# Altium PCB PCB4.PcbDoc (part 1 of 2)
Units mil, origin at the board's own origin, x right, y up, seen from the top; angles counter-clockwise.
Board outline 6000 x 4000 mil, 2 copper layers (Top Layer, Bottom Layer); 67 components, 41 nets, 192 pads, 16 vias.
Unrouted connection lines stored in the file: 1.
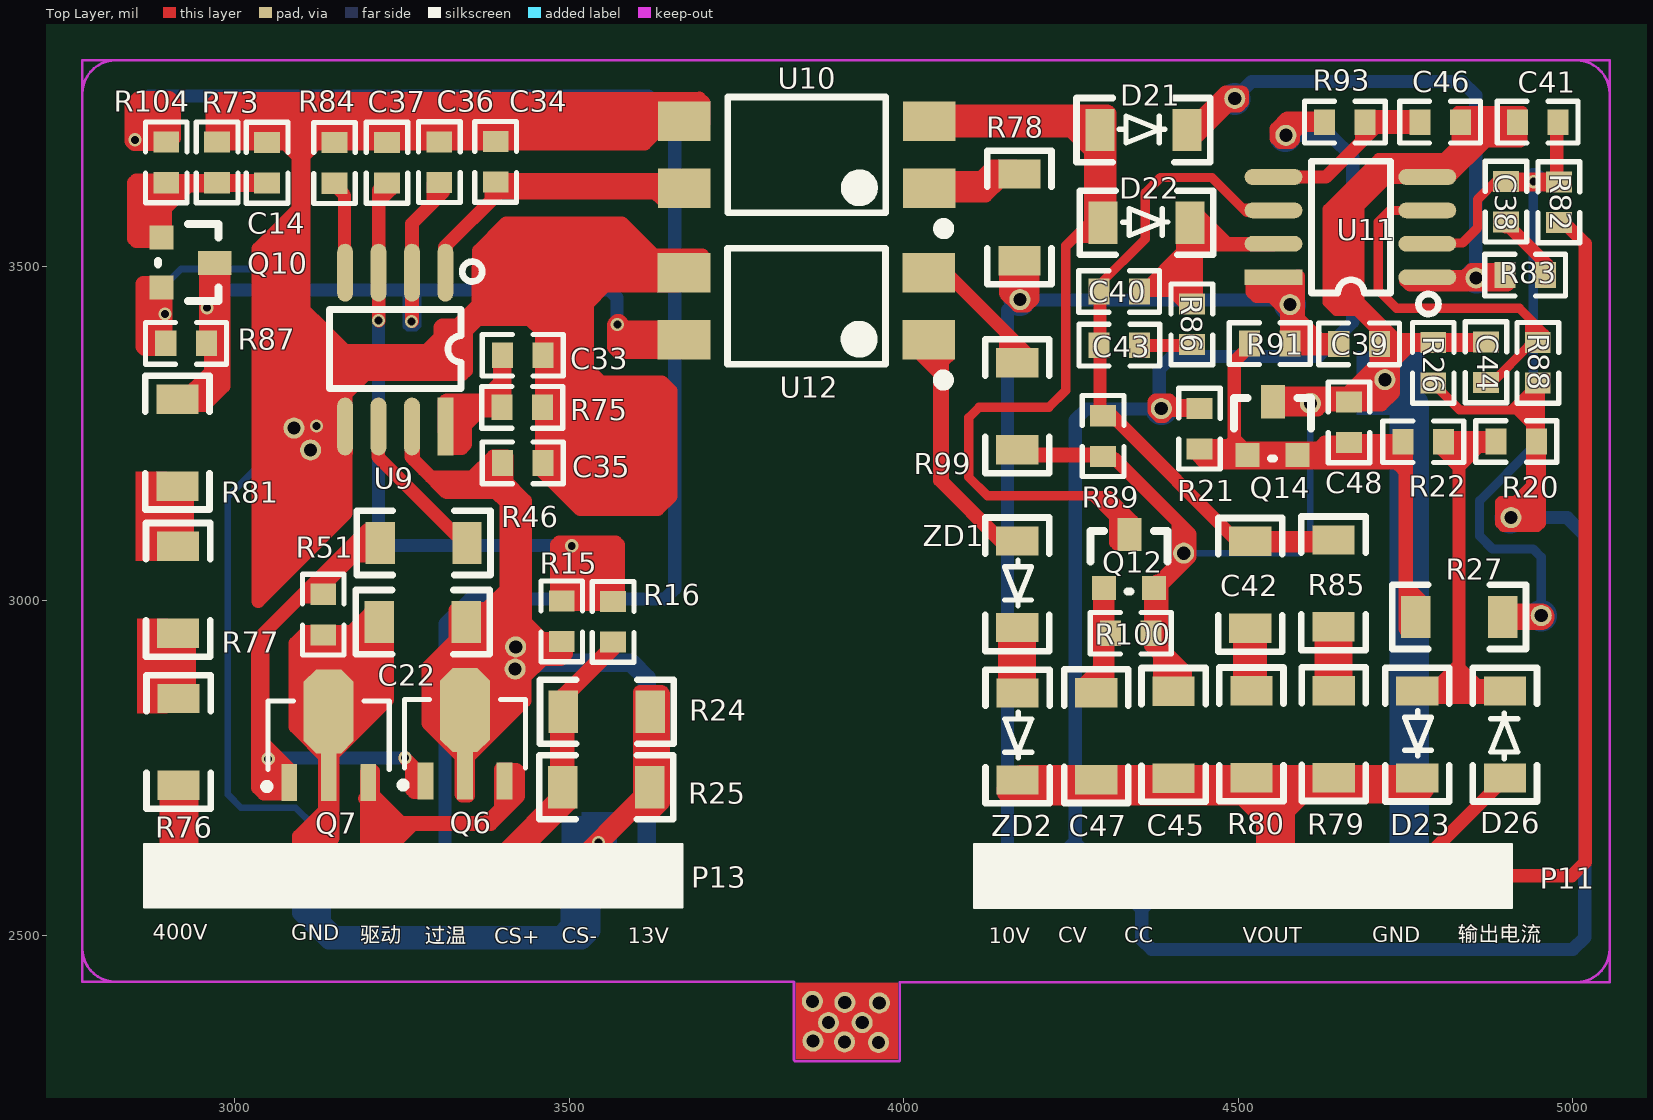
[diagram p0: Top Layer view]
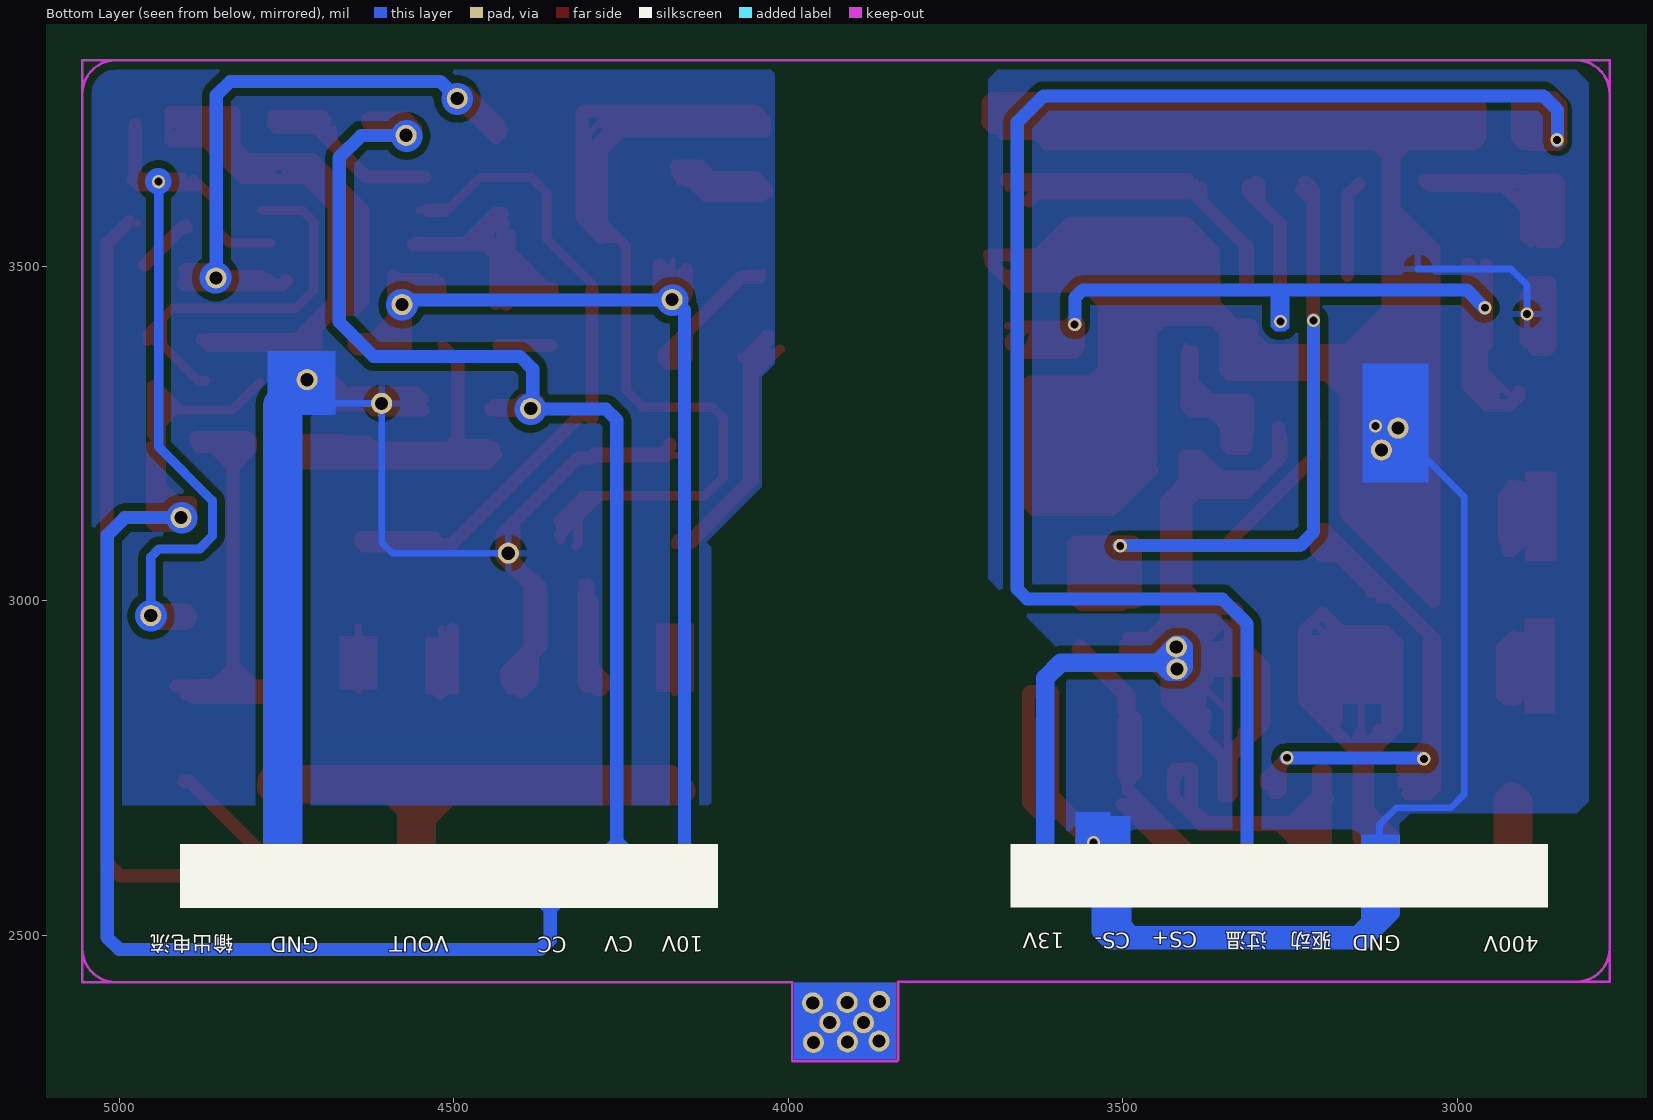
[diagram p1: Bottom Layer view, seen from below]

## Layer stack, top to bottom
Top Layer: signal copper 1.4
Dielectric: dielectric 12.6, FR-4, Dk 4.8
Bottom Layer: signal copper 1.4

## Board outline
1000,1000 7000,1000 7000,5000 1000,5000

## Design rules (kind name [scope] priority, off if disabled: settings)
Clearance [All] p1: gap=10
PolygonConnect [All] p1: connectstyle=Relief reliefconductorwidth=10 reliefentries=4 polygonreliefangle="90 Angle"
RoomDefinition Sheet4 [InComponentClass('Sheet4')] p1: confinementstyle=ConfineIn formatcopy=TRUE lockcomponents=FALSE outline 0,0 2000,0 2000,1000 0,1000
RoutingVias [All] p1: holewidth=28 width=50 viastyle="Through Hole" minholewidth=28 minwidth=50 maxholewidth=28 maxwidth=50
SilkscreenOverComponentPads [All] p1: minsilkscreentomaskgap=10
SolderMaskExpansion [All] p1: expansion=4
Width [All] p1: maxlimit=10 minlimit=10 preferedwidth=10
27 further rules are at their usual default settings.

## Components (designator, comment, footprint, x,y, rotation, side; value= is the part's Value field where it differs from the comment)
C14 "104/50V/0603" 0603 3048.11,3654.76 r90 top
C22 "475/50V/1206" 1206 3280.79,2967.76 r0 top
C33 "105/50V/0603" 0603 3430.39,3366.97 r180 top
C34 "472/50V/0603" 0603 3389.84,3655.94 r270 top
C35 "105/50V/0603" 0603 3430.39,3205.94 r180 top
C36 "104/50V/0603" 0603 3305.59,3655.55 r270 top
C37 "331/50V/0603" 0603 3227.24,3654.76 r270 top
C38 "103/50V/0603" 0603 4900.47,3596.5 r270 top
C39 "105/25V/0603" 0603 4680.79,3383.9 r0 top
C40 "102/50V/0603" 0603 4322.13,3462.24 r180 top
C41 "102/50V/0603" 0603 4947.72,3715.39 r0 top
C42 "102/1KV/1206" 1206 4518.19,3023.66 r270 top
C43 "103/50V/0603" 0603 4322.52,3381.93 r180 top
C44 "104/50V/0603" 0603 4870.55,3356.34 r90 top
C45 "224 250V/1206" 1206 4403.62,2799.25 r90 top
C46 "104/50V/0603" 0603 4802.05,3715.39 r180 top
C47 "223/500V/1206" 1206 4287.87,2797.28 r90 top
C48 "105/25V/0603" 0603 4665.83,3266.57 r90 top
D21 "1N4148W-G" SOD-123 4358.35,3703.58 r0 top
D22 "1N4148W-G" SOD-123 4363.07,3565 r0 top
D23 "E1J" SOD-123 4767.8,2799.65 r270 top
D26 "E1J" SOD-123 4898.9,2799.65 r90 top
P11 "2.54*8" 2.54*8#1 4456.38,2588.23 r0 top
P13 "2.54*8" 2.54*8#2 3215.83,2588.62 r0 top
Q6 "D882" D882 3343.78,2813.43 r270 top
Q7 "D772" D772 3141.42,2812.64 r270 top
Q10 "2N7002K" SOT-23/MOS 2924.49,3504.76 r270 top
Q12 "2N7002K" SOT-23/MOS 4337.48,3053.19 r0 top
Q14 "ME431AXG" ME431AXG 4552.05,3252.01 r0 top
R15 "120K 1%/0603" 0603 3488.66,2968.94 r270 top
R16 "1K 1%/0603" 0603 3565.43,2968.15 r90 top
R20 "39K 1%/0603" 0603 4915.83,3237.83 r180 top
R21 "10K 1%/0603" 0603 4442.2,3257.13 r90 top
R22 "2.2K 1%/0603" 0603 4776.85,3237.44 r180 top
R24 "20R 1%/1206" 1206 3555.98,2833.9 r0 top
R25 "20R 1%/1206" 1206 3555.2,2720.91 r0 top
R26 "1K 1%/0603" 0603 4791.81,3355.55 r90 top
R27 "470K 1%/1206" 1206 4830.39,2975.63 r180 top
R46 "39R/1206" 1206 3281.97,3086.26 r0 top
R51 "10K/0603" 0603 3131.97,2979.17 r270 top
R73 "2K/0603" 0603 2973.31,3655.16 r90 top
R75 "470K 1%/0603" 0603 3429.61,3289.02 r180 top
R76 "100K 1%/1206" 1206 2915.83,2788.62 r270 top
R77 "150K 1%/1206" 1206 2915.04,3016.18 r270 top
R78 "2K/1206" 1206 4172.91,3572.87 r270 top
R79 "9.1K 1%/1206" 1206 4642.99,2800.43 r270 top
R80 "2K 1%/1206" 1206 4519.76,2800.04 r270 top
R81 "150K 1%/1206" 1206 2913.86,3236.26 r270 top
R82 "1K 1%/0603" 0603 4979.61,3595.71 r90 top
R83 "10K/0603" 0603 4929.21,3486.65 r0 top
R84 "39K 1%/0603" 0603 3148.9,3654.37 r90 top
R85 "8.2K 1%/1206" 1206 4642.6,3025.63 r270 top
R86 "10K/0603" 0603 4430.79,3413.03 r90 top
R87 "2K 1%/0603" 0603 2926.85,3384.68 r0 top
R88 "10K/0603" 0603 4948.11,3355.55 r270 top
R89 "2K 1%/0603" 0603 4298.11,3246.1 r270 top
R91 "2K/0603" 0603 4547.32,3384.29 r180 top
R93 "10K 1%/0603" 0603 4659.53,3715.39 r0 top
R99 "220R/1206" 1206 4169.76,3290.59 r90 top
R100 "100K/0603" 0603 4339.45,2951.22 r0 top
R104 "2K/0603" 0603 2897.32,3655.16 r270 top
U9 "NCP1252A" SOP8 3272.52,3379.96 r270 top
U10 "EL817S1(A)(TU)-F" EL817A 3855.59,3683.11 r0 top
U11 "LM258" SOp8 4672.52,3525.63 r180 top
U12 "EL817S1(A)(TU)-F" EL817A 3855.2,3456.73 r0 top
ZD1 "13V" SOD-123 4169.76,3024.45 r270 top
ZD2 "13V" SOD-123 4170.16,2796.89 r270 top

## Footprints (in the part's own frame and the unit in brackets; to place one, negate y for a bottom-side part, rotate by r counter-clockwise, add the part's x,y. Pads: shape width x height; smd on the part's side, far side on the other; paste and mask are expansions set on the pad)
2.54*8#1 [mm]
  oval 1.4x1.8 hole 1: 1(-7.62,0) 2(-5.08,0) 3(-2.54,0) 5(2.54,0) 7(7.62,0) 8(10.16,0)
  round 0 hole 1: 4(0,0) 6(5.08,0)
  silkscreen extent -8.92,-1.2 11.5,1.2
2.54*8#2 [mm]
  oval 1.4x1.8 hole 1: 1(-7.62,0) 3(-2.54,0) 4(0,0) 5(2.54,0) 6(5.08,0) 7(7.62,0) 8(10.16,0)
  round 0 hole 1: 2(-5.08,0)
  silkscreen extent -8.92,-1.2 11.5,1.2
0603 [mm]
  rect 0.8x0.98 smd: 1(0.77,0) 2(-0.77,0)
  silkscreen extent -1.53,-0.79 1.54,0.79
1206 [mil]
  rect 44x63 smd: 1(-65,0) 2(65,0)
  silkscreen extent -100,-48 100,48
D772 [mm]
  rect 1.4x0.6 smd: 1(2.151,1.468) 2(2.151,-1.532)
  oct 3.2x1.9 smd: 3(-0.549,-0.032)
  rect 1.8x0.6 smd: 3(1.951,-0.032)
  silkscreen extent -0.95,-2.51 2.43,2.27
D882 [mm]
  rect 1.4x0.6 smd: 1(2.116,1.505) 2(2.116,-1.495)
  oct 3.2x1.9 smd: 3(-0.584,0.005)
  rect 1.8x0.6 smd: 3(1.916,0.005)
  silkscreen extent -0.98,-2.47 2.39,2.3
EL817A [mm]
  rect 2x1.5 smd: 1(4.633,-1.693) 2(4.633,0.847) 3(-4.667,0.847) 4(-4.667,-1.693)
  silkscreen extent -3.02,-3.42 5.38,1.78
ME431AXG [mil]
  rect 36x50 smd: 1(-0.19,45.63)
  rect 36x36 smd: 2(-38.19,-34.37) 3(36.81,-34.37)
  silkscreen extent -58,-39 57,51
SOD-123 [mm]
  rect 1.1x1.6 smd: 1(-1.65,0) 2(1.65,0)
  silkscreen extent -2.54,-1.22 2.54,1.22
SOP8 [mm]
  oval 2.2x0.6 smd: 1(-2.804,1.071) 2(-2.804,-0.199) 3(-2.804,-1.469) 4(-2.804,-2.739) 5(3.038,-2.739) 6(3.038,-1.469) 7(3.038,-0.199)
  rect 2.2x0.6 smd: 8(3.038,1.071)
  silkscreen extent -3.23,-3.33 1.6,2.47
SOp8 [mm]
  oval 2.2x0.6 smd: 1(-2.804,1.071) 2(-2.804,-0.199) 3(-2.804,-1.469) 4(-2.804,-2.739) 5(3.038,-2.739) 6(3.038,-1.469) 7(3.038,-0.199)
  rect 2.2x0.6 smd: 8(3.038,1.071)
  silkscreen extent -3.23,-3.33 1.6,2.47
SOT-23/MOS [mil]
  rect 36x50 smd: D(-0.19,45.63)
  rect 36x36 smd: G(-38.19,-34.37) S(36.81,-34.37)
  silkscreen extent -58,-39 57,51

## Part data
C14 C22 C33 C34 C35 C36 C37 C38 C39 C40 C41 C42 C43 C44 C45 C46 C47 C48: library part CAP, "Capacitor"
D21 D22 D23 D26: library part DIODE, "Diode"
P11 P13: library part "Header 8", "Header, 8-Pin"
Q6: library part 2N3904, "NPN General Purpose Amplifier"
Q7: library part 2N3906, "PNP General Purpose Amplifier"
Q10 Q12: library part "MOSFET N"
Q14: library part SCR, "Silicon Controlled Rectifier"
R15 R16 R20 R21 R22 R24 R25 R26 R27 R46 R51 R73 R75 R76 R77 R78 R79 R80 R81 R82 R83 R84 R85 R86 R87 R88 R89 R91 R93 R99 R100 R104: library part RES2
U9: library part Component_1
U10 U12: library part Optoisolator1, "4-Pin Phototransistor Optocoupler"
U11: library part AP4310
ZD1 ZD2: library part "DIODE TUNNEL", "Diode Tunnel"

## Free pads (board coordinates)
  round 31.5 hole 19.68: 0(3419.76,2930.75) 1(3863.46,2400.83) 2(3911.89,2399.25) 2(4953.23,2977.6) 3(3963.46,2398.46) 4(3864.25,2341.38) 5(3911.5,2340.2) 6(3962.28,2339.41) 7(3937.87,2368.94) 8(3887.48,2368.94) 28(3418.98,2897.68) 29(3113.07,3225.24) 30(3088.27,3257.91) 32(4173.7,3450.04) 33(4577.64,3442.56) 34(4855.59,3482.32) 35(4494.96,3750.83) 36(4571.34,3695.71) 37(4385.12,3287.05) 39(4607.95,3294.92) 40(4719.37,3330.35) 41(4907.95,3124.06) 42(4418.58,3070.91)

## Via types
v1: diameter 19.68, hole 11.81, Top Layer to Bottom Layer, 16 vias

## Nets (pads, with @x,y where several pads share a name; then routed paths per layer and width w, separated by ;. In a path a pad name is that pad's centre, name@x,y a point inside that pad or via, vN(x,y) a via of type N, cw(c..) or ccw(c..) an arc to the next point about the centre after c; other vN are vias at no path point)
10V: C39.2 P11.1 pad.32 pad.33 R78.2 R91.2 U11.8 | length 1840.4
  Top Layer w10: R78.2@4172.91,3507.87 4172.91,3450.83 pad.32@4173.7,3450.04 ; U11.8@4552.91,3483.46 4580,3456.38 4580,3383.11 C39.2@4653.23,3383.11
  Bottom Layer w10: P11.1@4156.38,2588.23 4156.38,3013.03 ; 4156.38,3094.13 4156.38,3013.03 ; pad.32@4175.67,3450.04 4570.16,3450.04 pad.33@4577.64,3442.56 ; pad.32@4178.82,3450.04 4156.38,3427.6 4156.38,3013.03
  Bottom Layer w19.68: P11.1@4156.77,2591.77 4154.02,2589.02 4140.63,2589.02 4135.91,2584.29 4135.91,2562.64 4139.06,2559.49 4170.55,2559.49 4176.85,2565.79 4176.85,2611.06 4173.7,2614.21 4139.06,2614.21 4135.91,2611.06 4135.91,2574.45 4137.48,2572.87 P11.1@4159.53,2572.87
13V-3: C22.2 C35.1 P13.8 pad.0 pad.28 Q6.3 R15.1 U9.7 | length 1725.4
  Top Layer w10: U9.7@3264.69,3260.35 3264.69,3216.54 3300.47,3180.75 3363.86,3180.75 C35.1@3402.44,3219.33 ; Q6.3@3343.57,2734.05 3343.57,2832.47 3343.57,2965.53 C22.2@3345.79,2967.76 3374.92,2938.62 R15.1@3488.66,2938.62 ; Q6.3@3343.96,2836.41 3414.68,2907.13 pad.28@3416.61,2907.13 ; C35.1@3400.08,3210.28 3400.08,3184.29 3417.01,3167.36 pad.0@3417.01,2938.62
  Bottom Layer w10: pad.28@3418.98,2907.13 3594.17,2907.13 3615.83,2885.47 P13.8@3615.83,2588.62
  Bottom Layer w19.68: P13.8@3615.43,2594.13 3612.68,2591.38 3599.29,2591.38 3594.57,2586.65 3594.57,2565 3597.72,2561.85 3629.21,2561.85 3635.51,2568.15 3635.51,2613.43 3632.36,2616.57 3597.72,2616.57 3594.57,2613.43 3594.57,2576.81 3596.14,2575.24 P13.8@3618.19,2575.24
400V: P13.1 R76.2 | length 365.4
  Top Layer w10: P13.1@2915.83,2588.62 R76.2@2915.83,2723.62
  Bottom Layer w19.68: P13.1@2894.96,2576.02 2896.54,2574.45 P13.1@2918.58,2574.45 ; P13.1@2894.96,2585.87 2899.69,2590.59 2913.07,2590.59 P13.1@2915.83,2593.35 ; P13.1@2894.96,2564.21 2894.96,2612.64 2898.11,2615.79 2932.76,2615.79 2935.91,2612.64 2935.91,2567.36 2929.61,2561.06 2898.11,2561.06 P13.1@2894.96,2564.21
CC-ADJ: P11.3 pad.41 R20.2 R26.2 R88.1 | length 2146.5
  Top Layer w10: R26.2@4791.42,3326.02 4833.15,3284.29 4907.17,3284.29 R88.1@4948.11,3325.24 4948.11,3239.8 R20.2@4946.14,3237.83 4946.14,3165 pad.41@4904.41,3123.27
  Bottom Layer w10: P11.3@4356.38,2588.23 4356.38,2494.53 4374.49,2476.42 4998.11,2476.42 5018.98,2497.28 5018.98,3098.46 4993.39,3124.06 pad.41@4907.95,3124.06
  Bottom Layer w19.68: P11.3@4357.17,2594.53 4354.41,2591.77 4341.02,2591.77 4336.3,2587.05 4336.3,2565.39 4339.45,2562.24 4370.94,2562.24 4377.24,2568.54 4377.24,2613.82 4374.09,2616.97 4339.45,2616.97 4336.3,2613.82 4336.3,2577.2 4337.87,2575.63 P11.3@4359.92,2575.63
CJ-2.5V: C48.2 Q14.2 Q14.3 R21.2 R22.1 R27.2 R91.1 | length 772.3
  Top Layer w10: R21.2@4436.3,3226.81 4504.68,3226.81 Q14.2@4513.86,3217.64 ; R91.1@4519.37,3383.11 4498.5,3362.24 4498.5,3232.99 Q14.2@4513.86,3217.64 ; R27.2@4765.39,2975.63 4746.54,2994.49 R22.1@4746.54,3237.44 4627.24,3237.44 4607.44,3217.64 Q14.2@4513.86,3217.64
CJ-HGQ: P13.6 R16.2 R24.1 R25.1 | length 651.4
  Top Layer w10: P13.6@3415.83,2588.62 3415.83,2629.57 3490.2,2703.94 R25.1@3490.2,2720.91 3490.2,2833.11 R24.1@3490.98,2833.9 3490.98,2852.76 3565.43,2927.2 R16.2@3565.43,2937.83
  Bottom Layer w19.68: P13.6@3415.04,2591.77 3412.28,2589.02 3398.9,2589.02 3394.17,2584.29 3394.17,2562.64 3397.32,2559.49 3428.82,2559.49 3435.12,2565.79 3435.12,2611.06 3431.97,2614.21 3397.32,2614.21 3394.17,2611.06 3394.17,2574.45 3395.75,2572.87 P13.6@3417.8,2572.87
CJ-QD: P13.4 Q6.1 Q7.1 | length 634.1
  Top Layer w10: 3202.35,2682.02 3219.37,2665 3376.06,2665 3402.62,2691.56 Q6.1@3402.62,2726.17 ; Q7.1@3202.35,2724 3202.35,2602.1 P13.4@3215.83,2588.62
  Bottom Layer w19.68: P13.4@3216.61,2592.95 3213.86,2590.2 3200.47,2590.2 3195.75,2585.47 3195.75,2563.82 3198.9,2560.67 3230.39,2560.67 3236.69,2566.97 3236.69,2612.24 3233.54,2615.39 3198.9,2615.39 3195.75,2612.24 3195.75,2575.63 3197.32,2574.06 P13.4@3219.37,2574.06
CJBO: C36.1 Q10.D R81.1 R87.1 U9.2 U12.4 | length 1581
  Top Layer w10: R81.1@2913.86,3301.26 2915.47,3301.26 2958.74,3344.53 2958.74,3483.73 Q10.D@2969.33,3494.32 ; v1(3263.86,3417.36) 3264.69,3418.19 U9.2@3264.69,3490.35 3264.69,3559.92 3302.05,3597.28 C36.1@3302.05,3625.63 ; v1@3569.37,3410.67 U12.4@3672.76,3410.67 ; U12.4@3670,3388.62 U12.4@3671.46,3390.08
  Bottom Layer w10: v1(2958.35,3437.83) 2986.69,3466.18 3559.13,3466.18 3571.34,3453.98 v1@3571.34,3415 ; 3250.08,3466.18 3255.19,3461.07 ; v1@3262.68,3415.39 3262.68,3460.67 3263.86,3459.49 v1(3263.86,3417.36) ; v1@3263.86,3423.66 3268.39,3428.19 3268.39,3458.5 3273.31,3463.43 3274.09,3462.64 3274.09,3411.46 3270.16,3407.52 3258.35,3407.52 3255.19,3410.67 3255.19,3461.07 ; 3276.06,3466.18 3263.86,3453.98 v1(3263.86,3417.36) ; 3255.19,3461.07 3263.86,3452.4 v1(3263.86,3417.36)
  other v1: 3571.73,3412.64
CJCOMP: D21.1 D22.1 Q12.D U10.2 | length 1223.5
  Top Layer w10: U10.2@4037.99,3716.46 4280.51,3716.46 4298.11,3698.86 D22.1@4298.11,3565 4275.28,3565 4242.6,3532.32 4242.6,3315.79 ; 4242.6,3315.39 4216.22,3289.02 4113.46,3289.02 4096.54,3272.09 4096.54,3183.5 4124.09,3155.94 4288.43,3155.94 Q12.D@4345.56,3098.82
CJCS: C37.1 R15.2 R16.1 U9.3 | length 964.6
  Top Layer w10: v1(3214.65,3418.94) U9.3@3214.65,3490.31 ; U9.3@3214.69,3490.35 3214.69,3611.89 C37.1@3227.24,3624.45 ; 3502.83,3052.8 3488.66,3038.62 R15.2@3488.66,2999.25 3564.65,2999.25 R16.1@3565.43,2998.46
  Bottom Layer w10: v1(3214.65,3418.94) 3214.65,3096.5 3230,3081.14 v1@3503.23,3081.14
  other v1: 3503.62,3081.93
COMP-1252: C34.1 U9.1 U10.4 | length 452.2
  Top Layer w10: U9.1@3314.69,3490.35 3314.69,3530 3389.84,3605.16 C34.1@3389.84,3625.63 3399.02,3616.46 U10.4@3671.85,3616.46
CS-: P11.7
CV-ADJ: P11.2 pad.36 pad.37 R21.1 R93.2 | length 1919.4
  Top Layer w10: pad.37@4381.97,3287.05 4382.36,3287.44 R21.1@4436.3,3287.44 ; pad.36@4571.34,3695.71 4591.02,3715.39 R93.2@4629.21,3715.39 R93.2@4624.49,3710.67
  Bottom Layer w10: P11.2@4256.38,2588.23 4256.38,3271.69 4271.73,3287.05 4381.97,3287.05 4381.97,3348.07 4397.72,3363.82 4616.22,3363.82 4673.7,3421.3 4673.7,3655.94 4633.94,3695.71 pad.36@4571.34,3695.71
  Bottom Layer w19.68: P11.2@4256.77,2592.56 4254.02,2589.8 4240.63,2589.8 4235.91,2585.08 4235.91,2563.43 4239.06,2560.28 4270.55,2560.28 4276.85,2566.57 4276.85,2611.85 4273.7,2615 4239.06,2615 4235.91,2611.85 4235.91,2575.24 4237.48,2573.66 P11.2@4259.53,2573.66
DRV: R46.2 U9.6 | length 229.4
  Top Layer w10: U9.6@3214.69,3260.35 3214.69,3217.72 3346.14,3086.26 R46.2@3346.97,3086.26
GND: C14.1 C22.1 C33.2 C34.2 C35.2 C36.2 C37.2 P13.3 P13.7 pad.29 pad.30 Q7.3 Q10.S R24.2 R25.2 R51.1 R73.1 R75.2 R84.1 R87.2 U9.5 U10.3 U12.3 | length 5814.6
  Top Layer w10: Q10.S@2889.33,3457.32 2896.54,3450.12 R87.2@2896.54,3381.54 ; R73.1@2973.31,3685.47 2974.09,3686.26 C34.2@3389.84,3686.26 ; 3057.95,3453.98 3164.69,3347.24 ; 3058.74,3495.71 3058.74,3453.19 3164.69,3347.24 ; 3095.75,3283.9 3095.75,3240.2 3096.93,3239.02 3118.27,3260.35 U9.5@3164.69,3260.35 ; 3105.2,3686.26 3099.69,3680.75 3099.69,3398.86 3164.69,3333.86 U9.5@3164.69,3260.35 ; P13.3@3115.83,2588.62 3115.83,2640.98 3143.29,2668.45 3143.29,2830.31 3143.29,2937.54 R51.1@3131.97,2948.86 3196.89,2948.86 C22.1@3215.79,2967.76 ; C34.2@3389.06,3685.47 3420.04,3716.46 U10.3@3671.85,3716.46 ; 3463.07,3226.42 3463.07,3454.76 3498.39,3490.08 U12.3@3671.46,3490.08 3429.49,3490.08 3286.65,3347.24 3164.69,3347.24 ; P13.7@3515.83,2588.62 3515.83,2616.54 R25.2@3620.2,2720.91 3620.2,2833.11 R24.2@3620.98,2833.9 ; U9.5@3164.69,3260.35 3164.69,3347.24
  Top Layer w19.68: Q10.S@2878.43,3466.18 2878.43,3381.54 2884.33,3375.63 2864.65,3375.63 2861.1,3379.17 2861.1,3474.06 2862.28,3475.24 2888.66,3475.24 2889.06,3474.84 2887.09,3474.84 2886.69,3474.45 2886.69,3463.82 2895.35,3455.16 R87.2@2895.35,3388.23 ; Q10.S@2896.93,3455.94 2896.93,3389.41 2897.32,3389.02 R87.2@2897.32,3390.2
  Bottom Layer w10: v1(2895.35,3428.78) 2895.35,3471.69 2919.37,3495.71 3058.74,3495.71 ; 3096.93,3237.44 3071.34,3237.44 2989.45,3155.55 2989.45,2709.88 3009.13,2690.2 3090.63,2690.2 3115.83,2665 P13.3@3115.83,2588.62 3115.83,2509.88 3137.87,2487.83 3504.02,2487.83 3515.83,2499.65 P13.7@3515.83,2588.62 ; 3538.66,2622.48 3515.83,2599.65 P13.7@3515.83,2588.62 ; P13.7@3515.83,2588.62 3515.83,2622.09 3531.97,2638.23 v1(3543.78,2638.23) ; P13.7@3515.83,2588.62 3543.78,2616.57 v1(3543.78,2638.23) ; P13.7@3515.83,2588.62 3515.83,2610.28 v1(3543.78,2638.23)
  other v1: 3122.13,3261.06
GND2: C39.1 C41.2 C44.1 C45.2 C46.2 C48.1 D26.1 pad.39 pad.40 pad.42 Q12.S Q14.1 R26.1 R89.1 R99.1 R100.1 U11.4 | length 3223.3
  Top Layer w10: R99.1@4167.36,3217.36 R89.1@4291.81,3217.36 ; R89.1@4294.96,3215 4295.35,3214.61 4311.1,3214.61 4424.09,3101.61 4424.09,3068.62 Q12.S@4383.74,3028.27 ; C45.2@4378.43,2883.86 Q12.S@4378.43,3027.99 ; C45.2@4383.74,2884.13 C45.2@4403.62,2864.25 ; Q14.1@4551.86,3297.64 4552.61,3296.89 C48.1@4665.83,3296.89 4692.2,3296.89 4724.49,3329.17 C39.1@4724.49,3386.65 ; 4756.38,2588.23 4756.38,2590.98 4898.9,2733.5 D26.1@4898.9,2734.69 ; C44.1@4870.55,3386.65 4869.37,3385.47 C39.1@4724.49,3386.65 ; C41.2@4917.4,3715.39 C46.2@4832.36,3715.39 4832.36,3669.33 4796.5,3633.46 U11.4@4782.91,3633.46 4719.72,3633.46 4681.57,3595.31 4681.57,3446.1 4716.22,3411.46 C39.1@4724.49,3386.65
  Bottom Layer w10: pad.42@4418.58,3070.91 4591.81,3070.91 4607.95,3087.05 pad.39@4607.95,3294.92 4683.94,3294.92 pad.40@4719.37,3330.35 4756.38,3293.35 4756.38,2588.23
  Bottom Layer w19.68: 4756.38,2588.62 4753.62,2585.87 4740.24,2585.87 4735.51,2581.14 4735.51,2559.49 4738.66,2556.34 4770.16,2556.34 4776.46,2562.64 4776.46,2607.91 4773.31,2611.06 4738.66,2611.06 4735.51,2607.91 4735.51,2571.3 4737.09,2569.72 4759.13,2569.72
GWKZ: P13.5 R104.2 | length 2617.3
  Top Layer w10: v1(2850.47,3689.02) 2854.02,3685.47 R104.2@2900.87,3685.47
  Bottom Layer w10: v1(2850.47,3689.02) 2850.47,3737.05 2870.16,3756.73 3617.4,3756.73 3658.35,3715.79 3658.35,3016.18 3645.75,3003.58 3350.08,3003.58 3313.46,2966.97 3313.46,2590.98 P13.5@3315.83,2588.62
  Bottom Layer w19.68: P13.5@3316.22,2593.35 3313.46,2590.59 3300.08,2590.59 3295.35,2585.87 3295.35,2564.21 3298.5,2561.06 3330,2561.06 3336.3,2567.36 3336.3,2612.64 3333.15,2615.79 3298.5,2615.79 3295.35,2612.64 3295.35,2576.02 3296.93,2574.45 P13.5@3318.98,2574.45
IOUT: P11.8 R82.2 | length 1400.8
  Top Layer w10: P11.8@4856.38,2588.23 5001.26,2588.23 5019.37,2606.34 5019.37,3539.02 4993.78,3564.61 R82.2@4972.52,3564.61
  Bottom Layer w19.68: P11.8@4856.77,2592.56 4854.02,2589.8 4840.63,2589.8 4835.91,2585.08 4835.91,2563.43 4839.06,2560.28 4870.55,2560.28 4876.85,2566.57 4876.85,2611.85 4873.7,2615 4839.06,2615 4835.91,2611.85 4835.91,2575.24 4837.48,2573.66 P11.8@4859.53,2573.66
  other v1: 4872.13,2563.03 4840.24,2563.82
NetC14_2: C14.2 Q10.G R73.2 R104.1 | length 252.6
  Top Layer w10: Q10.G@2889.33,3532.32 2889.33,3613.31 2900.87,3624.84 R73.2@2981.18,3624.84 ; R73.2@2973.31,3624.84 3047.72,3624.84 C14.2@3048.11,3624.45
NetC33_1: C33.1 R75.1 U9.8 | length 196.8
  Top Layer w10: U9.8@3314.69,3260.35 3314.69,3280.39 3337.48,3303.19 3405.2,3303.19 C33.1@3405.2,3379.96
NetC38_1: C38.1 R83.1 | length 86.3
  Top Layer w10: C38.1@4900.47,3566.18 4900.47,3563.43 R83.1@4959.53,3504.37
NetC38_2: C38.2 C41.1 pad.2@4953.23,2977.6 R27.1 R82.1 U11.2 | length 1171.7
  Top Layer w10: U11.2@4782.91,3533.46 4835.47,3533.46 4857.56,3555.55 4857.56,3596.89 4886.69,3626.02 4978.82,3626.02 4978.03,3626.81 C41.1@4978.03,3715.39 ; R27.1@4895.39,2975.63 4897.36,2977.6 pad.2@4959.92,2977.6
  Bottom Layer w10: v1(4941.42,3626.42) 4941.42,3228.39 4860.32,3147.28 4860.32,3096.5 4880.39,3076.42 4942.99,3076.42 4953.62,3065.79 4953.62,2985.47 pad.2@4959.53,2979.57
NetC40_1: C40.1 C42.1 C43.1 R85.1 R89.2 U11.6 | length 1003
  Top Layer w10: C42.1@4518.19,3088.66 4498.46,3088.66 4301.65,3285.47 4294.96,3285.47 4294.96,3459.09 C40.1@4291.81,3462.24 4291.81,3472.09 4361.5,3541.77 4361.5,3608.7 4386.3,3633.5 4459.92,3633.5 4509.96,3583.46 U11.6@4552.91,3583.46 ; C42.1@4520.16,3090.63 R85.1@4642.6,3090.63
NetC40_2: C40.2 D22.2 R86.1 U11.7 | length 346.9
  Top Layer w10: C40.2@4352.44,3462.24 4397.32,3462.24 4416.22,3443.35 R86.1@4430.79,3443.35 4428.03,3446.1 D22.2@4428.03,3565 4452.83,3565 4484.37,3533.46 U11.7@4552.91,3533.46
NetC42_2: C42.2 R80.1 | length 94.3
  Top Layer w10: C42.2@4518.19,2958.66 4518.19,2866.61 R80.1@4519.76,2865.04
NetC43_2: C43.2 R86.2 | length 77.2
  Top Layer w10: C43.2@4353.62,3382.72 R86.2@4430.79,3382.72
NetC44_2: C44.2 R88.2 U11.3 | length 560.8
  Top Layer w10: U11.3@4782.91,3583.46 4726.02,3583.46 4710.71,3568.15 4710.71,3463.82 4737.87,3436.65 4922.13,3436.65 4948.11,3410.67 R88.2@4948.11,3385.87 ; C44.2@4870.55,3326.02 4879.61,3326.02 R88.2@4939.45,3385.87
NetC46_1: C46.1 R93.1 U11.5 | length 267.7
  Top Layer w10: U11.5@4552.91,3633.46 4633.5,3633.46 4689.84,3689.8 R93.1@4689.84,3715.39 C46.1@4771.73,3715.39
NetC47_2: C47.2 Q12.G R100.2 | length 174.6
  Top Layer w10: C47.2@4287.87,2862.28 4308.74,2883.15 Q12.G@4308.74,3028.27
NetD21_2: D21.2 pad.34 pad.35 R83.2 U11.1 | length 869.1
  Top Layer w10: D21.2@4423.31,3703.58 4450.08,3703.58 pad.35@4496.54,3750.04 ; U11.1@4782.91,3483.46 R83.2@4895.71,3483.46
  Bottom Layer w10: pad.35@4487.87,3744.13 4520.16,3776.42 4836.3,3776.42 4855.59,3757.13 pad.34@4855.59,3482.32
NetD23_1: D23.1 D26.2 R20.1 R22.2 | length 665.5
  Top Layer w10: D23.1@4767.8,2864.61 D26.2@4898.9,2864.61 4835.91,2864.61 4835.91,2867.76 4831.18,2872.48 4831.18,3078.78 ; R22.2@4807.17,3237.44 4807.56,3237.83 R20.1@4885.51,3237.83 ; 4831.18,3077.6 4831.18,3212.24 ; 4831.18,3199.25 4831.18,3241.38
NetQ6_2: Q6.2 Q7.2 R46.1 R51.2 | length 741.7
  Top Layer w10: Q7.2@3084.24,2724.01 3046.54,2761.71 3046.54,2948.46 3107.56,3009.49 R51.2@3131.97,3009.49 3131.97,3025.24 3192.99,3086.26 R46.1@3216.97,3086.26 ; v1@3253.62,2765 Q6.2@3286.48,2732.14 ; Q6.2@3284.51,2726.17 Q6.2@3284.51,2739.23
  Bottom Layer w10: v1(3049.69,2763.43) 3051.26,2765 v1(3254.41,2765)
NetR76_1: R76.1 R77.2 | length 167.6
  Top Layer w10: R76.1@2915.83,2853.62 R77.2@2915.83,2950.39
  Top Layer w19.68: R76.1@2931.97,2859.49 R77.2@2931.97,2930.35
NetR77_1: R77.1 R81.2 | length 88.9
  Top Layer w10: R77.1@2915.04,3081.18 R81.2@2915.04,3170.08
NetR78_1: R78.1 U10.1 | length 133.9
  Top Layer w10: U10.1@4037.99,3616.46 4053.86,3632.32 4156.42,3632.32 R78.1@4162.68,3626.06
NetR79_1: R79.1 R85.2 | length 95.4
  Top Layer w10: R85.2@4642.6,2960.63 4642.6,2865.83 R79.1@4642.99,2865.43
NetR84_2: R84.2 U9.4 | length 140.2
  Top Layer w10: R84.2@3148.9,3624.06 3164.69,3608.27 U9.4@3164.69,3490.35
NetR99_2: R99.2 U12.2 | length 197.7
  Top Layer w10: U12.2@4037.6,3490.08 4059.25,3490.08 4168.98,3380.35 R99.2@4168.98,3359.53
NetU12_1: U12.1 ZD1.1 | length 373.2
  Top Layer w10: U12.1@4037.6,3390.08 4053.62,3374.06 4053.62,3175.24 4139.45,3089.41 ZD1.1@4169.76,3089.41
NetZD1_2: ZD1.2 ZD2.1 | length 97.8
  Top Layer w10: ZD1.2@4169.76,2959.49 4170.16,2959.09 ZD2.1@4170.16,2861.85
V+: C45.1 C47.1 D23.2 P11.5 R79.2 R80.2 ZD2.2 | length 997.1
  Top Layer w10: ZD2.2@4172.91,2734.68 D23.2@4767.8,2734.68 ; R80.2@4519.76,2735.04 4556.38,2698.43 P11.5@4556.38,2588.23
  Bottom Layer w19.68: P11.5@4556.38,2592.56 4553.62,2589.8 4540.24,2589.8 4535.51,2585.08 4535.51,2563.43 4538.66,2560.28 4570.16,2560.28 4576.46,2566.57 4576.46,2611.85 4573.31,2615 4538.66,2615 4535.51,2611.85 4535.51,2575.24 4537.09,2573.66 P11.5@4559.13,2573.66
  other v1: 4540.63,2564.21 4570.16,2564.21
pads on no net: P11.4 P11.6 P13.2